# Altium PCB IMTM-Right-PCB03.PcbDoc
Units mm, origin at the board's own origin, x right, y up, seen from the top; angles counter-clockwise.
Board outline 206.22 x 62.12 mm, 2 copper layers (Top Layer, Bottom Layer), stack 0.096 mm thick; 6 components, 7 nets, 14 pads, 0 vias.
Unrouted connection lines stored in the file: 1.
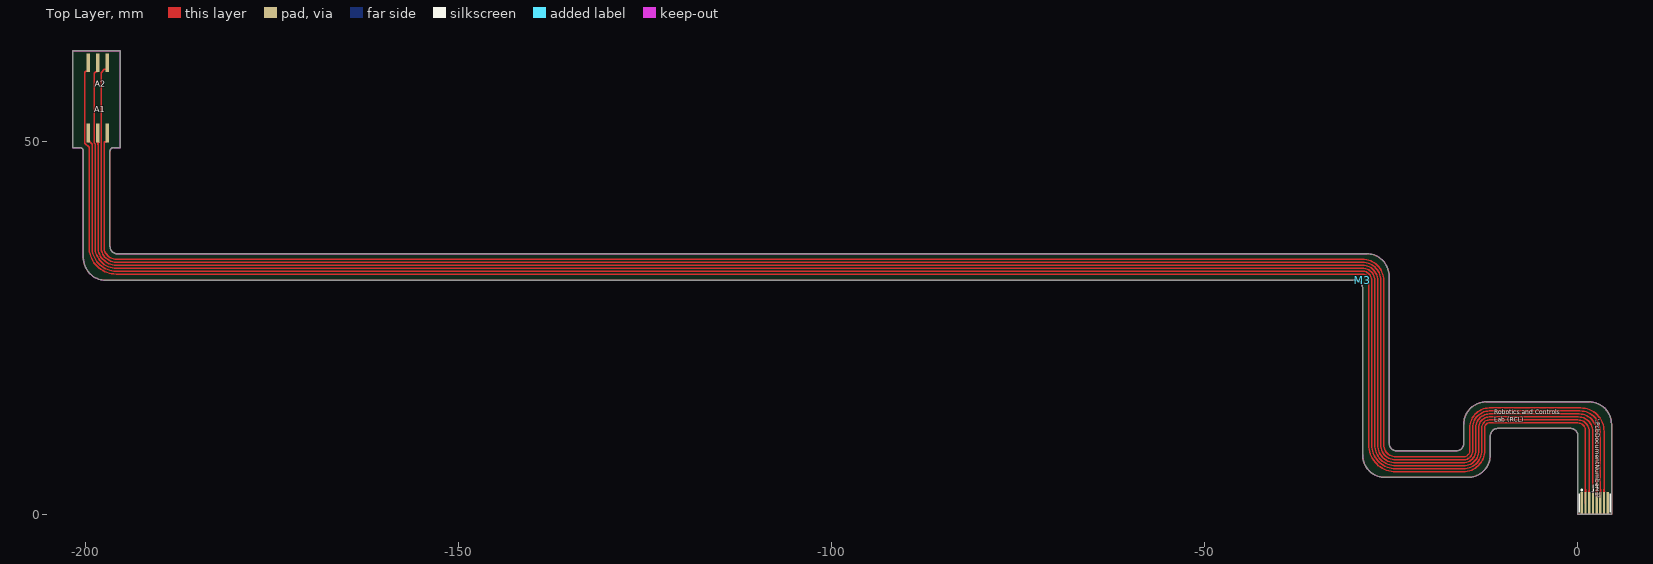
[diagram p0: Top Layer view]
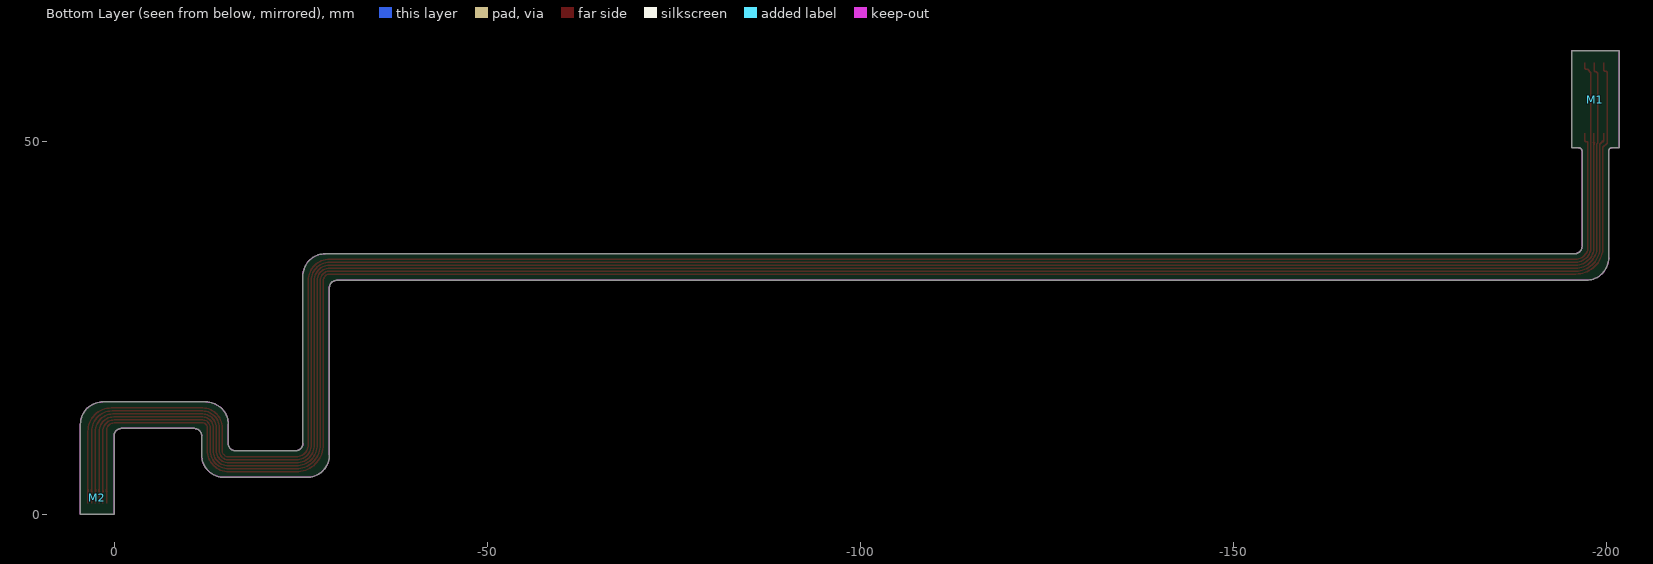
[diagram p1: Bottom Layer view, seen from below]

## Layer stack, top to bottom
Flex Top Coverlay: solder mask 0.05, PI + Adhesive, Dk 3.4
Top Layer: signal copper 0.0356
Polyimide: dielectric 0.025, Adhesive + PI, Dk 3.4
Bottom Layer: signal copper 0.0356
Bottom Coverlay: solder mask 0.05, PI + Adhesive, Dk 3.4

## Board outline
-197.318,31.388 cw(c-197.318,34.388) -200.318,34.388 -200.318,48.668 ccw(c-200.818,48.668) -200.818,49.168 -201.715,49.168 -201.715,62.122 -195.365,62.122 -195.365,49.168 -196.262,49.168 ccw(c-196.262,48.668) -196.762,48.668 -196.762,35.944 ccw(c-195.762,35.944) -195.762,34.944 -28.312,34.944 cw(c-28.312,31.944) -25.312,31.944 -25.312,9.528 ccw(c-24.312,9.528) -24.312,8.528 -16.312,8.528 ccw(c-16.312,9.528) -15.312,9.528 -15.312,12.088 cw(c-12.312,12.088) -12.312,15.088 1.5,15.088 cw(c1.5,12.088) 4.5,12.088 4.5,0 0,0 0,10.528 ccw(c-1,10.528) -1,11.528 -10.752,11.528 ccw(c-10.752,10.528) -11.752,10.528 -11.752,7.972 cw(c-14.752,7.972) -14.752,4.972 -25.868,4.972 cw(c-25.868,7.972) -28.868,7.972 -28.868,30.388 ccw(c-29.868,30.388) -29.868,31.388
board region FPC: 4.5,4.5 4.5,0 0,0 0,4.5
board region Flex2: 4.5,11.528 4.5,4.5 0,4.5 0,10.528 -0.005,10.626 -0.043,10.818 -0.118,10.999 -0.227,11.162 -0.366,11.301 -0.529,11.41 -0.71,11.485 -0.902,11.523 -1,11.528
board region HLE: -200.318,48.168 -200.318,48.668 -200.328,48.765 -200.402,48.945 -200.54,49.083 -200.72,49.158 -200.818,49.168 -201.715,49.168 -201.715,62.122 -195.365,62.122 -195.365,49.168 -196.262,49.168 -196.36,49.158 -196.54,49.083 -196.678,48.945 -196.752,48.765 -196.762,48.668 -196.762,48.168
board region Flex4: -25.312,24.437 -25.312,9.528 -25.307,9.43 -25.269,9.237 -25.194,9.056 -25.085,8.893 -24.946,8.755 -24.783,8.646 -24.602,8.571 -24.41,8.532 -24.312,8.528 -16.312,8.528 -16.214,8.532 -16.022,8.571 -15.841,8.646 -15.678,8.755 -15.539,8.893 -15.43,9.056 -15.355,9.237 -15.317,9.43 -15.312,9.528 -15.312,12.088 -15.312,12.284 -15.261,12.674 -15.159,13.054 -15.008,13.417 -14.812,13.758 -14.572,14.07 -14.294,14.348 -13.982,14.587 -13.642,14.784 -13.278,14.934 -12.899,15.036 -12.509,15.088 -12.312,15.088 1.5,15.088 1.697,15.088 2.087,15.036 2.466,14.934 2.83,14.784 3.17,14.587 3.482,14.348 3.76,14.07 4,13.758 4.196,13.417 4.347,13.054 4.449,12.674 4.5,12.284 4.5,12.088 4.5,11.528 -1,11.528 -10.752,11.528 -10.85,11.523 -11.042,11.485 -11.223,11.41 -11.386,11.301 -11.525,11.162 -11.634,10.999 -11.709,10.818 -11.747,10.626 -11.752,10.528 -11.752,7.972 -11.752,7.775 -11.803,7.385 -11.905,7.005 -12.056,6.642 -12.252,6.301 -12.492,5.989 -12.77,5.711 -13.082,5.472 -13.422,5.275 -13.786,5.125 -14.165,5.023 -14.555,4.972 -14.752,4.972 -25.868,4.972 -26.065,4.972 -26.455,5.023 -26.834,5.125 -27.198,5.275 -27.538,5.472 -27.85,5.711 -28.128,5.989 -28.368,6.301 -28.564,6.642 -28.715,7.005 -28.817,7.385 -28.868,7.775 -28.868,7.972 -28.868,24.437
board region Flex4: -36.018,31.388 -197.318,31.388 -197.515,31.388 -197.905,31.439 -198.284,31.541 -198.648,31.691 -198.988,31.888 -199.3,32.127 -199.578,32.405 -199.818,32.717 -200.014,33.058 -200.165,33.421 -200.267,33.801 -200.318,34.191 -200.318,34.388 -200.318,48.168 -196.762,48.168 -196.762,35.944 -196.757,35.846 -196.719,35.653 -196.644,35.472 -196.535,35.309 -196.396,35.171 -196.233,35.062 -196.052,34.987 -195.86,34.948 -195.762,34.944 -36.018,34.944
board region CRN: -28.868,24.437 -28.868,30.388 -28.873,30.486 -28.911,30.678 -28.986,30.859 -29.095,31.022 -29.234,31.161 -29.397,31.27 -29.578,31.345 -29.77,31.383 -29.868,31.388 -36.018,31.388 -36.018,34.944 -28.312,34.944 -28.115,34.944 -27.725,34.892 -27.346,34.79 -26.982,34.64 -26.642,34.443 -26.33,34.204 -26.052,33.926 -25.812,33.614 -25.616,33.273 -25.465,32.91 -25.363,32.53 -25.312,32.14 -25.312,31.944 -25.312,24.437

## Design rules (kind name [scope] priority, off if disabled: settings)
Clearance [All] p1: gap=0.15 ignorepadtopadclearanceinfootprint=FALSE
ComponentClearance [All] p1: gap=0.1 collisioncheckmode=3 verticalgap=0.254 showdistances=FALSE
FabricationTestPointUsage TestPointUsage [All] p1: valid=0 allowmultiple=FALSE
FabricationTestpoint Testpoint [All] p1: side=3 testpointundercomponent=TRUE minsize=1.016 maxsize=2.54 preferedsize=1.524 minholesize=0 maxholesize=1.016 preferedholesize=0.813 testpointgrid=0.025 allowsidetop=TRUE allowsidebottom=TRUE usegrid=TRUE gridtolerance=0
PolygonConnect [All] p1: connectstyle=Relief reliefconductorwidth=0.254 reliefentries=4 polygonreliefangle="90 Angle" airgapwidth=0.254
RoutingVias [All] p1: holewidth=0.711 width=1.27 viastyle="Through Hole" minholewidth=0.711 minwidth=1.27 maxholewidth=0.711 maxwidth=1.27
SilkToSolderMaskClearance SilkscreenOverComponentPads [IsPad] p1: minsilkscreentomaskgap=0.254 clearancetoexposedcopper=TRUE
SolderMaskExpansion [All] p1: expansion=0.102
Width [All] p1: maxlimit=0.175 minlimit=0.175 preferedwidth=0.175
26 further rules are at their usual default settings.

## Components (designator, comment, footprint, x,y, rotation, side; value= is the part's Value field where it differs from the comment)
A1 "DRV5055A2QLPGM" DRV5055A2QLPGM -198.4,51.228 r0 top
A2 "DRV5055A2QLPGM" DRV5055A2QLPGM -198.4,60.428 r180 top
J1 "687108182122_matingPad" 687108182122_MATINGPAD 2.25,1.524 r0 top
M1 "Stiffener,HLE,PI,0.15mm" HLE_stiffener -198.538,55.578 r180 bottom
M2 "Stiffener,FPC,PI,0.15mm" FPC_STIFFENER 2.25,2.25 r180 bottom
M3 "Stiffener,CRN,PI,0.15mm" CRN_STIFFENER -28.868,31.388 r0 top

## Footprints (in the part's own frame and the unit in brackets; to place one, negate y for a bottom-side part, rotate by r counter-clockwise, add the part's x,y. Pads: shape width x height; smd on the part's side, far side on the other; paste and mask are expansions set on the pad)
687108182122_MATINGPAD [mm]
  rect 0.3x3 smd mask+0: 1(-1.75,0) 2(-1.25,0) 3(-0.75,0) 4(-0.25,0) 5(0.25,0) 6(0.75,0) 7(1.25,0) 8(1.75,0)
  silkscreen extent -2.1,-1.25 2.1,1.82
CRN_STIFFENER [mm]
  body extent -7.15,-6.95 3.55,3.55, height 0.25
DRV5055A2QLPGM [mm]
  rect 0.45x2.5 smd: 1(-1.27,-0.1) 2(0,-0.1) 3(1.27,-0.1)
  body extent -2.1,1.42 2.1,4.5, height 1.57
FPC_STIFFENER [mm]
  body extent -2.25,-2.25 3,2.25, height 0.25
HLE_stiffener [mm]
  body extent -3.18,-7.42 3.17,6.54, height 0.15

## Part data
A1: library part A1324LUA-T, "Texas Instruments - DRV5055A2QLPGM - Hall Effect Sensor, Linear", Case/Package=SIP, Manufacturer="Allegro MicroSystems", Max Operating Temperature=150°C, Max Output Current=10mA, Max Supply Current=9mA, Max Supply Voltage=5.5V, Min Operating Temperature=-40°C, Min Supply Voltage=4.5V, Operating Supply Voltage=5V, Package Quantity=4000, Supplier Part Number 1=620-1432-ND, Category=Sensors, ComponentLink1Description=https://datasheet.ciiva.com/15099/getdatasheetpartid-367817-15099484.pdf?src-supplier=Verical, ComponentLink1URL=https://datasheet.ciiva.com/15099/getdatasheetpartid-367817-15099484.pdf?src-supplier=Verical, ComponentLink2Description=https://datasheet.ciiva.com/22624/1538021-22624823.pdf?src-supplier=Element14, ComponentLink2URL=https://datasheet.ciiva.com/22624/1538021-22624823.pdf?src-supplier=Element14, ComponentLink3Description=https://datasheet.ciiva.com/14094/a1324-26-eng-tds-14094701.pdf?src-supplier=Distrelec, ComponentLink3URL=https://datasheet.ciiva.com/14094/a1324-26-eng-tds-14094701.pdf?src-supplier=Distrelec, Height=3.02mm, Length=4.09mm, Manufacturer Part Number=A1324LUA-T, Mount="Through Hole", Number of Pins=3, Operating Supply Current=9mA, Output Current=10mA, Output Type=Digital, Packaging=Bag, Pricing 1="1=2.00000, 5=1.89000, 10=1.62000, 25=1.29600, 50=1.18800, 100=1.08000, 500=0.94500, 1000=0.83700, 5000=0.78300 (USD)", Radiation Hardening=No, REACH SVHC="No SVHC", RoHS=Yes, Stock 1=15828, Supplier 1=Digi-Key, Width=1.52mm
A2: library part A1324LUA-T, "Texas Instruments DRV5055A2QLPGM - Hall Effect Sensor, Linear", Case/Package=SIP, Manufacturer="Allegro MicroSystems", Max Operating Temperature=150°C, Max Output Current=10mA, Max Supply Current=9mA, Max Supply Voltage=5.5V, Min Operating Temperature=-40°C, Min Supply Voltage=4.5V, Operating Supply Voltage=5V, Package Quantity=4000, Supplier Part Number 1=620-1432-ND, Category=Sensors, ComponentLink1Description=https://datasheet.ciiva.com/15099/getdatasheetpartid-367817-15099484.pdf?src-supplier=Verical, ComponentLink1URL=https://datasheet.ciiva.com/15099/getdatasheetpartid-367817-15099484.pdf?src-supplier=Verical, ComponentLink2Description=https://datasheet.ciiva.com/22624/1538021-22624823.pdf?src-supplier=Element14, ComponentLink2URL=https://datasheet.ciiva.com/22624/1538021-22624823.pdf?src-supplier=Element14, ComponentLink3Description=https://datasheet.ciiva.com/14094/a1324-26-eng-tds-14094701.pdf?src-supplier=Distrelec, ComponentLink3URL=https://datasheet.ciiva.com/14094/a1324-26-eng-tds-14094701.pdf?src-supplier=Distrelec, Height=3.02mm, Length=4.09mm, Manufacturer Part Number=A1324LUA-T, Mount="Through Hole", Number of Pins=3, Operating Supply Current=9mA, Output Current=10mA, Output Type=Digital, Packaging=Bag, Pricing 1="1=2.00000, 5=1.89000, 10=1.62000, 25=1.29600, 50=1.18800, 100=1.08000, 500=0.94500, 1000=0.83700, 5000=0.78300 (USD)", Radiation Hardening=No, REACH SVHC="No SVHC", RoHS=Yes, Stock 1=15828, Supplier 1=Digi-Key, Width=1.52mm
M1: library part HLE_stiffener, "MECH,Stiffener,IMTM-PCB03_04,HLE", CreatedBy="A. Hadi"
M2: library part FPC_STIFFENER, "MECH,Stiffener,IMTM-PCB03_04,FPC", CreatedBy="A. Hadi"
M3: "MECH,Stiffener,IMTM-PCB03_04,CRN"

## Nets (pads, with @x,y where several pads share a name; then routed paths per layer and width w, separated by ;. In a path a pad name is that pad's centre, name@x,y a point inside that pad or via, vN(x,y) a via of type N, cw(c..) or ccw(c..) an arc to the next point about the centre after c; other vN are vias at no path point)
HLE1_GND: A1.2 J1.5 | length 258
  Top Layer w0.175: A1.2@-198.357,51.07 -198.357,35.85 ccw(c-195.925,35.85) -195.925,33.418 -28.897,33.418 cw(c-28.897,31.373) -26.852,31.373 -26.852,9.338 ccw(c-24.431,9.338) -24.431,6.916 -15.369,6.916 ccw(c-15.369,8.588) -13.697,8.588 -13.697,11.642 cw(c-11.866,11.642) -11.866,13.472 0.151,13.472 cw(c0.151,11.124) 2.5,11.124 J1.5
HLE1_VCC: A1.1 J1.3 | length 258.2
  Top Layer w0.175: A1.1 -199.67,50.103 -199.533,49.965 -199.486,49.965 -199.157,49.636 -199.157,35.85 ccw(c-195.925,35.85) -195.925,32.618 -195.924,32.618 -28.897,32.618 cw(c-28.897,31.373) -27.652,31.373 -27.652,9.338 ccw(c-24.431,9.338) -24.431,6.116 -15.369,6.116 ccw(c-15.369,8.588) -12.897,8.588 -12.897,11.642 cw(c-11.866,11.642) -11.866,12.672 -0.012,12.672 cw(c-0.012,11.16) 1.5,11.16 J1.3
HLE1_VOUT: A1.3 J1.7 | length 258.6
  Top Layer w0.175: A1.3 -197.13,50.103 -197.268,49.965 -197.455,49.965 -197.557,49.863 -197.557,35.85 ccw(c-195.925,35.85) -195.925,34.218 -28.897,34.218 cw(c-28.897,31.373) -26.052,31.373 -26.052,9.338 ccw(c-24.431,9.338) -24.431,7.716 -15.369,7.716 ccw(c-15.369,8.588) -14.497,8.588 -14.497,11.642 cw(c-11.866,11.642) -11.866,14.272 0.351,14.272 cw(c0.351,11.124) 3.5,11.124 J1.7
HLE2_GND: A2.2 J1.4 | length 267.7
  Top Layer w0.175: A2.2 -198.4,59.503 -198.538,59.365 -198.655,59.365 -198.863,59.158 -198.863,49.779 -198.757,49.674 -198.757,35.85 ccw(c-195.925,35.85) -195.925,33.018 -195.924,33.018 -28.897,33.018 cw(c-28.897,31.373) -27.252,31.373 -27.252,9.338 ccw(c-24.431,9.338) -24.431,6.516 -15.369,6.516 ccw(c-15.369,8.588) -13.297,8.588 -13.297,11.642 cw(c-11.866,11.642) -11.866,13.072 0.052,13.072 cw(c0.052,11.124) 2,11.124 J1.4
HLE2_VCC: A2.1 J1.6 | length 268.1
  Top Layer w0.175: A2.1 -197.13,59.785 -197.268,59.648 -197.515,59.648 -197.938,59.225 -197.938,49.779 -197.957,49.759 -197.957,35.85 ccw(c-195.925,35.85) -195.925,33.818 -195.924,33.818 -28.897,33.818 cw(c-28.897,31.373) -26.452,31.373 -26.452,9.338 ccw(c-24.431,9.338) -24.431,7.316 -15.369,7.316 ccw(c-15.369,8.588) -14.097,8.588 -14.097,11.642 cw(c-11.866,11.642) -11.866,13.872 0.251,13.872 cw(c0.251,11.124) 3,11.124 J1.6
HLE2_VOUT: A2.3 J1.2 | length 267.8
  Top Layer w0.175: A2.3 -199.67,59.529 -199.808,59.391 -200.03,59.391 -200.133,59.289 -200.133,49.779 -199.557,49.204 -199.557,35.85 ccw(c-195.925,35.85) -195.925,32.218 -28.897,32.218 cw(c-28.897,31.373) -28.052,31.373 -28.052,9.338 ccw(c-24.431,9.338) -24.431,5.716 -15.369,5.716 ccw(c-15.369,8.588) -12.497,8.588 -12.497,11.642 cw(c-11.866,11.642) -11.866,12.272 -0.012,12.272 cw(c-0.012,11.26) 1,11.26 J1.2
HLE_GNDPLN: J1.1 J1.8

## Polygon pours and split planes (outlines as drawn)
no net on Component Body (solid): -25.312,31.944
HLE_GNDPLN on Top Layer "HLE_GNDPLN_L01_P000" (solid, remove dead copper, pour order 0): -197.318,31.388 cw(c-197.318,34.388) -200.318,34.388 -200.318,48.668 ccw(c-200.818,48.668) -200.818,49.168 -201.715,49.168 -201.715,62.122 -195.365,62.122 -195.365,49.168 -196.262,49.168 ccw(c-196.262,48.668) -196.762,48.668 -196.762,35.944 ccw(c-195.762,35.944) -195.762,34.944 -28.312,34.944 cw(c-28.312,31.944) -25.312,31.944 -25.312,9.528 ccw(c-24.312,9.528) -24.312,8.528 -16.312,8.528 ccw(c-16.312,9.528) -15.312,9.528 -15.312,12.088 cw(c-12.312,12.088) -12.312,15.088 1.5,15.088 cw(c1.5,12.088) 4.5,12.088 4.5,0 0,0 0,10.528 ccw(c-1,10.528) -1,11.528 -10.752,11.528 ccw(c-10.752,10.528) -11.752,10.528 -11.752,7.972 cw(c-14.752,7.972) -14.752,4.972 -25.868,4.972 cw(c-25.868,7.972) -28.868,7.972 -28.868,30.388 ccw(c-29.868,30.388) -29.868,31.388

## Keep-outs
Keep-Out Layer:
  lines w0.15: 0,0 0,10.528 ccw(c-1,10.528) -1,11.528 -10.752,11.528 ccw(c-10.752,10.528) -11.752,10.528 -11.752,7.972 cw(c-14.752,7.972) -14.752,4.972 -25.868,4.972 cw(c-25.868,7.972) -28.868,7.972 -28.868,30.388 ccw(c-29.868,30.388) -29.868,31.388 -197.318,31.388 cw(c-197.318,34.388) -200.318,34.388 -200.318,48.668 ; 4.5,0 4.5,12.088 ; -200.818,49.168 cw(c-200.818,48.668) -200.318,48.668 ; -200.818,49.168 -201.715,49.168 -201.715,62.122 -195.365,62.122 -195.365,49.168 -196.262,49.168 ; -200.818,49.168 -200.818,49.168 ; -200.318,48.668 -200.318,48.668 ; -196.762,35.944 ccw(c-195.762,35.944) -195.762,34.944 -28.312,34.944 ; -196.762,35.944 -196.762,35.944 ; -196.762,35.944 -196.762,48.668 cw(c-196.262,48.668) -196.262,49.168 ; -196.262,49.168 -196.262,49.168 ; -28.312,34.944 cw(c-28.312,31.944) -25.312,31.944 ; -28.312,34.944 -28.312,34.944 ; -25.312,9.528 ccw(c-24.312,9.528) -24.312,8.528 -16.312,8.528 ccw(c-16.312,9.528) -15.312,9.528 -15.312,12.088 cw(c-12.312,12.088) -12.312,15.088 1.5,15.088 cw(c1.5,12.088) 4.5,12.088 ; -25.312,9.528 -25.312,9.528 ; -25.312,9.528 -25.312,31.944 ; -25.312,31.944 -25.312,31.944 ; 4.5,12.088 4.5,12.088

## Silkscreen, mask and mechanical layers (free items; w line width, h text height)
Flex Top Overlay:
  text "'.PcbDocumentNumber_1'" at 2.135,12.857 h1 r270
  text "Robotics and Controls / Lab (RCL)" at -11.212,12.221 h1
DXF Board Layout:
  the board outline again, w0.013
Split Lines:
  lines w0.013: -200.318,48.168 -196.762,48.168 ; -1,11.528 4.5,11.528 ; 0,4.5 4.5,4.5
Mech Dimensions:
  text "All outer corner radii are 3.00 mm" at -216.306,22.302 h3.5
  text "All inner corner radii / are 1.00 mm" at -69,21.328 h3.5
Drill Drawing:
  drawing of 527 lines, arcs and shapes, not listed
  text "Layer" at -113.031,130.919 h1.52
  text "Name" at -102.62,130.919 h1.52
  text "Material" at -74.18,130.919 h1.52
  text "Thickness" at -51.834,130.919 h1.52
  text "Constant" at -35.328,130.919 h1.52
  text "Generic" at -20.854,130.919 h1.52
  text "Flex" at -7.395,130.919 h1.52
  text "Polymide Stiffener" at 5.556,130.919 h1.52
  text "Flex Top Overlay" at -102.62,127.871 h1.52
  text "Flex Top Coverlay" at -102.62,124.823 h1.52
  text "PI + Adhesive" at -74.18,124.823 h1.52
  text "0.050mm" at -51.834,124.823 h1.52
  text "3.4" at -35.328,124.823 h1.52
  text "1" at -113.031,121.775 h1.52
  text "Top Layer" at -102.62,121.775 h1.52
  text "Copper" at -74.18,121.775 h1.52
  text "0.036mm" at -51.834,121.775 h1.52
  text "Polyimide" at -102.62,118.727 h1.52
  text "Adhesive + PI" at -74.18,118.727 h1.52
  text "0.025mm" at -51.834,118.727 h1.52
  text "3.4" at -35.328,118.727 h1.52
  text "2" at -113.031,115.679 h1.52
  text "Bottom Layer" at -102.62,115.679 h1.52
  text "Copper" at -74.18,115.679 h1.52
  text "0.036mm" at -51.834,115.679 h1.52
  text "Bottom Coverlay" at -102.62,112.631 h1.52
  text "PI + Adhesive" at -74.18,112.631 h1.52
  text "0.050mm" at -51.834,112.631 h1.52
  text "3.4" at -35.328,112.631 h1.52
  text "Bottom Overlay" at -102.62,109.583 h1.52
  text "25 um" at -204.325,94.566 h1
  text "Polyimide" at -232.425,94.5 h1
  text "Coverlay Adhesive" at -232.425,91.75 h1
  text "35 um" at -204.325,91.566 h1
  text "0.12 mm" at -133.231,90.139 h1 r90
  text "Base Copper" at -232.425,89.25 h1
  text "36 um" at -204.266,89.132 h1
  text "Flex Circuit" at -177,88.25 h1 r90
  text "Polyimide" at -162.64,87.112 h1
  text "Adhesive" at -232.425,86.75 h1
  text "25 um" at -195,85.327 h1
  text "Polyimide" at -232.5,84.078 h1
  text "0.15 mm" at -133.2,83.428 h1 r90
  text "FINISHED THICKNESS" at -183.975,82.915 h1 r90
  text "FINISHED THICKNESS" at -125.338,82.759 h1 r90
  text "121 um +/- 10 um" at -181.975,82.515 h1 r90
  text "0.27 mm +/- 0.05 mm" at -127.458,81.312 h1 r90
  text "Flex Layer Stack Detail" at -229.278,79.828 h2
  text "Polyimide Stiffener Detail" at -178.947,79.686 h2
  text "NOT TO SCALE" at -208.33,77.078 h1
  text "NOT TO SCALE" at -154.856,76.936 h1
Titleblock:
  lines w0.127: -246.126,-0.783 -241.046,-0.783 ; -246.126,47.477 -241.046,47.477 ; -246.126,95.737 -241.046,95.737 ; -173.101,-49.043 -173.101,-43.963 ; -173.101,138.917 -173.101,143.997 ; -100.076,-49.043 -100.076,-43.963 ; -100.076,138.917 -100.076,143.997 ; -73.406,-36.343 40.894,-36.343 ; -73.406,-28.723 40.894,-28.723 ; -73.406,-21.103 -35.306,-21.103 ; -35.306,-43.963 -35.306,-28.723 -35.306,-13.483 ; -27.051,-49.043 -27.051,-43.963 ; -27.051,138.917 -27.051,143.997 ; 18.034,-43.963 18.034,-28.723 ; 40.894,-0.783 45.974,-0.783 ; 40.894,47.477 45.974,47.477 ; 40.894,95.737 45.974,95.737 ; -73.406,-43.963 -73.406,-13.483 ; -73.406,-43.963 -108.966,-43.963 -108.966,-13.483 -73.406,-13.483 ; -73.406,-43.963 40.894,-43.963 ; -73.406,-13.483 -35.306,-13.483 ; -35.306,-13.483 40.894,-13.483 40.894,-43.963 ; 40.894,-43.963 40.894,138.917 -241.046,138.917 -241.046,-43.963 40.894,-43.963 ; -246.126,-49.043 -246.126,143.997 45.974,143.997 45.974,-49.043 -246.126,-49.043
  text "1" at -209.88,140.568 h1.78
  text "2" at -137.236,140.568 h1.78
  text "3" at -64.084,140.568 h1.78
  text "4" at 8.814,140.568 h1.78
  text "NOTES:" at -233.485,133.36 h2
  text "1." at -233.485,131.36 h2
  text "Dimensions are in mm unless specified otherwise.  Tolerances are as indicated on Dimensions layer unless otherwise noted." at -230.485,131.36 h2
  text "2." at -233.485,129.36 h2
  text "All dimensional limits apply after plating or processing." at -230.485,129.36 h2
  text "3." at -233.485,127.36 h2
  text "Refer to drill table for hole size tolerances." at -230.485,127.36 h2
  text "4." at -233.485,125.36 h2
  text "Hole / slot plating to be 0.001\" minimum average and 0.0008\" absolute minimum." at -230.485,125.36 h2
  text "Hole / slot diameters are specified after plating." at -230.485,123.36 h2
  text "5." at -233.485,121.36 h2
  text "Thickness and tolerances for flex circuit and stiffeners are as indicated on Layer Stack detail." at -230.485,121.36 h2
  text "6." at -233.485,119.36 h2
  text "Base Materials:" at -230.485,119.36 h2
  text "As noted in layer stack." at -218.485,119.36 h2
  text "A" at -244.221,117.555 h1.78
  text "A" at 42.799,117.555 h1.78
  text "7." at -233.485,117.36 h2
  text "Coverlay:" at -230.485,117.36 h2
  text "As noted in layer stack.  Registration to be within +/- 0.003 of respective signal layers." at -218.485,117.36 h2
  text "8." at -233.485,115.36 h2
  text "Silkscreen:" at -230.485,115.36 h2
  text "White non-conductive ink (top and bottom).  No ink to appear on exposed copper." at -218.485,115.36 h2
  text "9." at -233.485,113.36 h2
  text "Finish:" at -230.485,113.36 h2
  text "Electroless Nickel Immersion Gold (ENIG).  Finish both sides with 150 micro inches" at -218.485,113.36 h2
  text "minimum electroless Nickel (Ni) followed by minimum 2 microinches immersion Gold (Au)." at -218.485,111.36 h2
  text "10." at -233.485,109.36 h2
  text "Electrical Test:" at -230.485,109.36 h2
  text "Perform 100% continuity and isolation testing per current IPC test methods." at -218.485,109.36 h2
  text "11." at -233.485,107.36 h2
  text "Controlled impedance is not required." at -230.485,107.36 h2
  text "12." at -233.485,105.36 h2
  text "Do not panelize.  Supply as individual flexible PCBs." at -230.485,105.36 h2
  text "The FPC is single layer with all the components and traces on the Base Copper layer and the PI stiffeners on the bottom" at -232.819,98.36 h2
  text "B" at -244.221,69.498 h1.78
  text "B" at 42.799,69.498 h1.78
  text "C" at -244.221,20.984 h1.78
  text "C" at 42.799,20.984 h1.78
  text "ENGINEER:" at -72.136,-16.023 h1.14
  text "TITLE:" at -34.036,-16.023 h1.14
  text "Tolerances unless otherwise specified:" at -151.595,-16.693 h1.52
  text "Robotics and Controls" at -106.522,-17.993 h3.18
  text ".ProjectTitle" at -26.241,-19.491 h6.35
  text ".X +/- 0.20" at -146.261,-19.868 h1.52
  text "'.DrawnBy'" at -71.25,-19.922 h3.17
  text "'.DrawnDate'" at -52,-19.925 h3.17
  text "Laboratory (RCL)" at -106.522,-21.243 h3.18
  text ".XX +/- 0.10" at -147.658,-22.408 h1.52
  text "PCB DESIGNER:" at -72.136,-23.516 h1.14
  text "'.DocumentTitle'" at -26.241,-23.542 h3.81
  text ".XXX +/- 0.05" at -149.055,-24.948 h1.52
  text "D" at -244.221,-27.022 h1.78
  text "D" at 42.799,-27.022 h1.78
  text "'.DrawnBy'" at -71.414,-27.289 h3.17
  text "'.DrawnDate'" at -52.164,-27.292 h3.17
  text "DATE:" at -72.136,-31.263 h1.14
  text "PART NO.:" at -34.036,-31.263 h1.14
  text "REV:" at 19.304,-31.263 h1.14
  text "3090 Kaiser Building" at -105.156,-33.803 h3.17
  text "'.PcbDocumentNumber_1'" at -23.25,-34.422 h3.17
  text ".PRINT_DATE" at -70.25,-34.672 h3.17
  text "'.Rev'" at 19.372,-35.064 h3.17
  text "2332 Main Mall" at -105.156,-36.343 h3.17
  text "Vancouver, BC" at -105.156,-38.883 h3.17
  text "FILE NAME:" at -72.136,-38.883 h1.14
  text "DWG NO:" at -34.036,-38.883 h1.14
  text "SCALE:" at 19.304,-38.883 h1.14
  text "V6J 1R6" at -105.156,-41.423 h3.17
  text ".PCB_FILE_NAME_NO_PATH" at -72.5,-42.172 h3.17
  text "'.PcbDocumentNumber_1'" at -23.75,-42.172 h3.17
  text "1:1" at 19.456,-43.006 h3.17
  text "1" at -209.88,-47.392 h1.78
  text "2" at -137.236,-47.392 h1.78
  text "3" at -64.084,-47.392 h1.78
  text "4" at 8.814,-47.392 h1.78

## Dimensions
-36.018,34.948 to -25.308,32.097 on Mech Dimensions
-28.158,34.948 to -25.308,24.458 on Mech Dimensions
-29.868,30.388 to -29.548,29.5 on Mech Dimensions
-144.526,96 to -144.526,83.378 on Drill Drawing
-144.526,96 to -144.526,90 on Drill Drawing
-144.526,90 to -144.526,83.378 on Drill Drawing
-198,88.25 to -198,83.328 on Drill Drawing
-197.925,96 to -198,83.328 on Drill Drawing
-201.712,62.116 to -200.315,48.162 on Mech Dimensions
4.5,0 to 4.5,4.5 on Mech Dimensions
-197.318,34.388 to -201.397,28.071 on Mech Dimensions
-201.715,62.122 to 4.5,0 on Mech Dimensions
-11.752,10.528 to -201.715,62.122 on Mech Dimensions
-201.715,62.122 to -25.312,31.944 on Mech Dimensions
0,0 to 4.5,0 on Mech Dimensions
-12.312,15.088 to -10.752,11.528 on Mech Dimensions
-24.312,8.528 to -25.868,4.972 on Mech Dimensions
-28.868,30.388 to -25.312,31.944 on Mech Dimensions
-195.762,34.944 to -197.318,31.388 on Mech Dimensions
-201.715,62.122 to -10.752,11.528 on Mech Dimensions
-201.715,62.122 to 0,0 on Mech Dimensions
-201.715,62.122 to -25.868,4.972 on Mech Dimensions
-201.715,62.122 to -197.318,31.388 on Mech Dimensions
-196.262,48.668 to -195.936,48.62 on Mech Dimensions
-196.762,35.944 to -200.318,48.668 on Mech Dimensions
-195.365,62.122 to -201.715,62.122 on Mech Dimensions
-201.715,62.122 to -200.818,49.168 on Mech Dimensions